# Altium PCB HANCv1.PcbDoc
Units mil, origin at the board's own origin, x right, y up, seen from the top; angles counter-clockwise.
Board outline 6000 x 4000 mil, 2 copper layers (Top Layer, Bottom Layer); 214 components, 228 nets, 817 pads, 36 vias.
Unrouted connection lines stored in the file: 457.
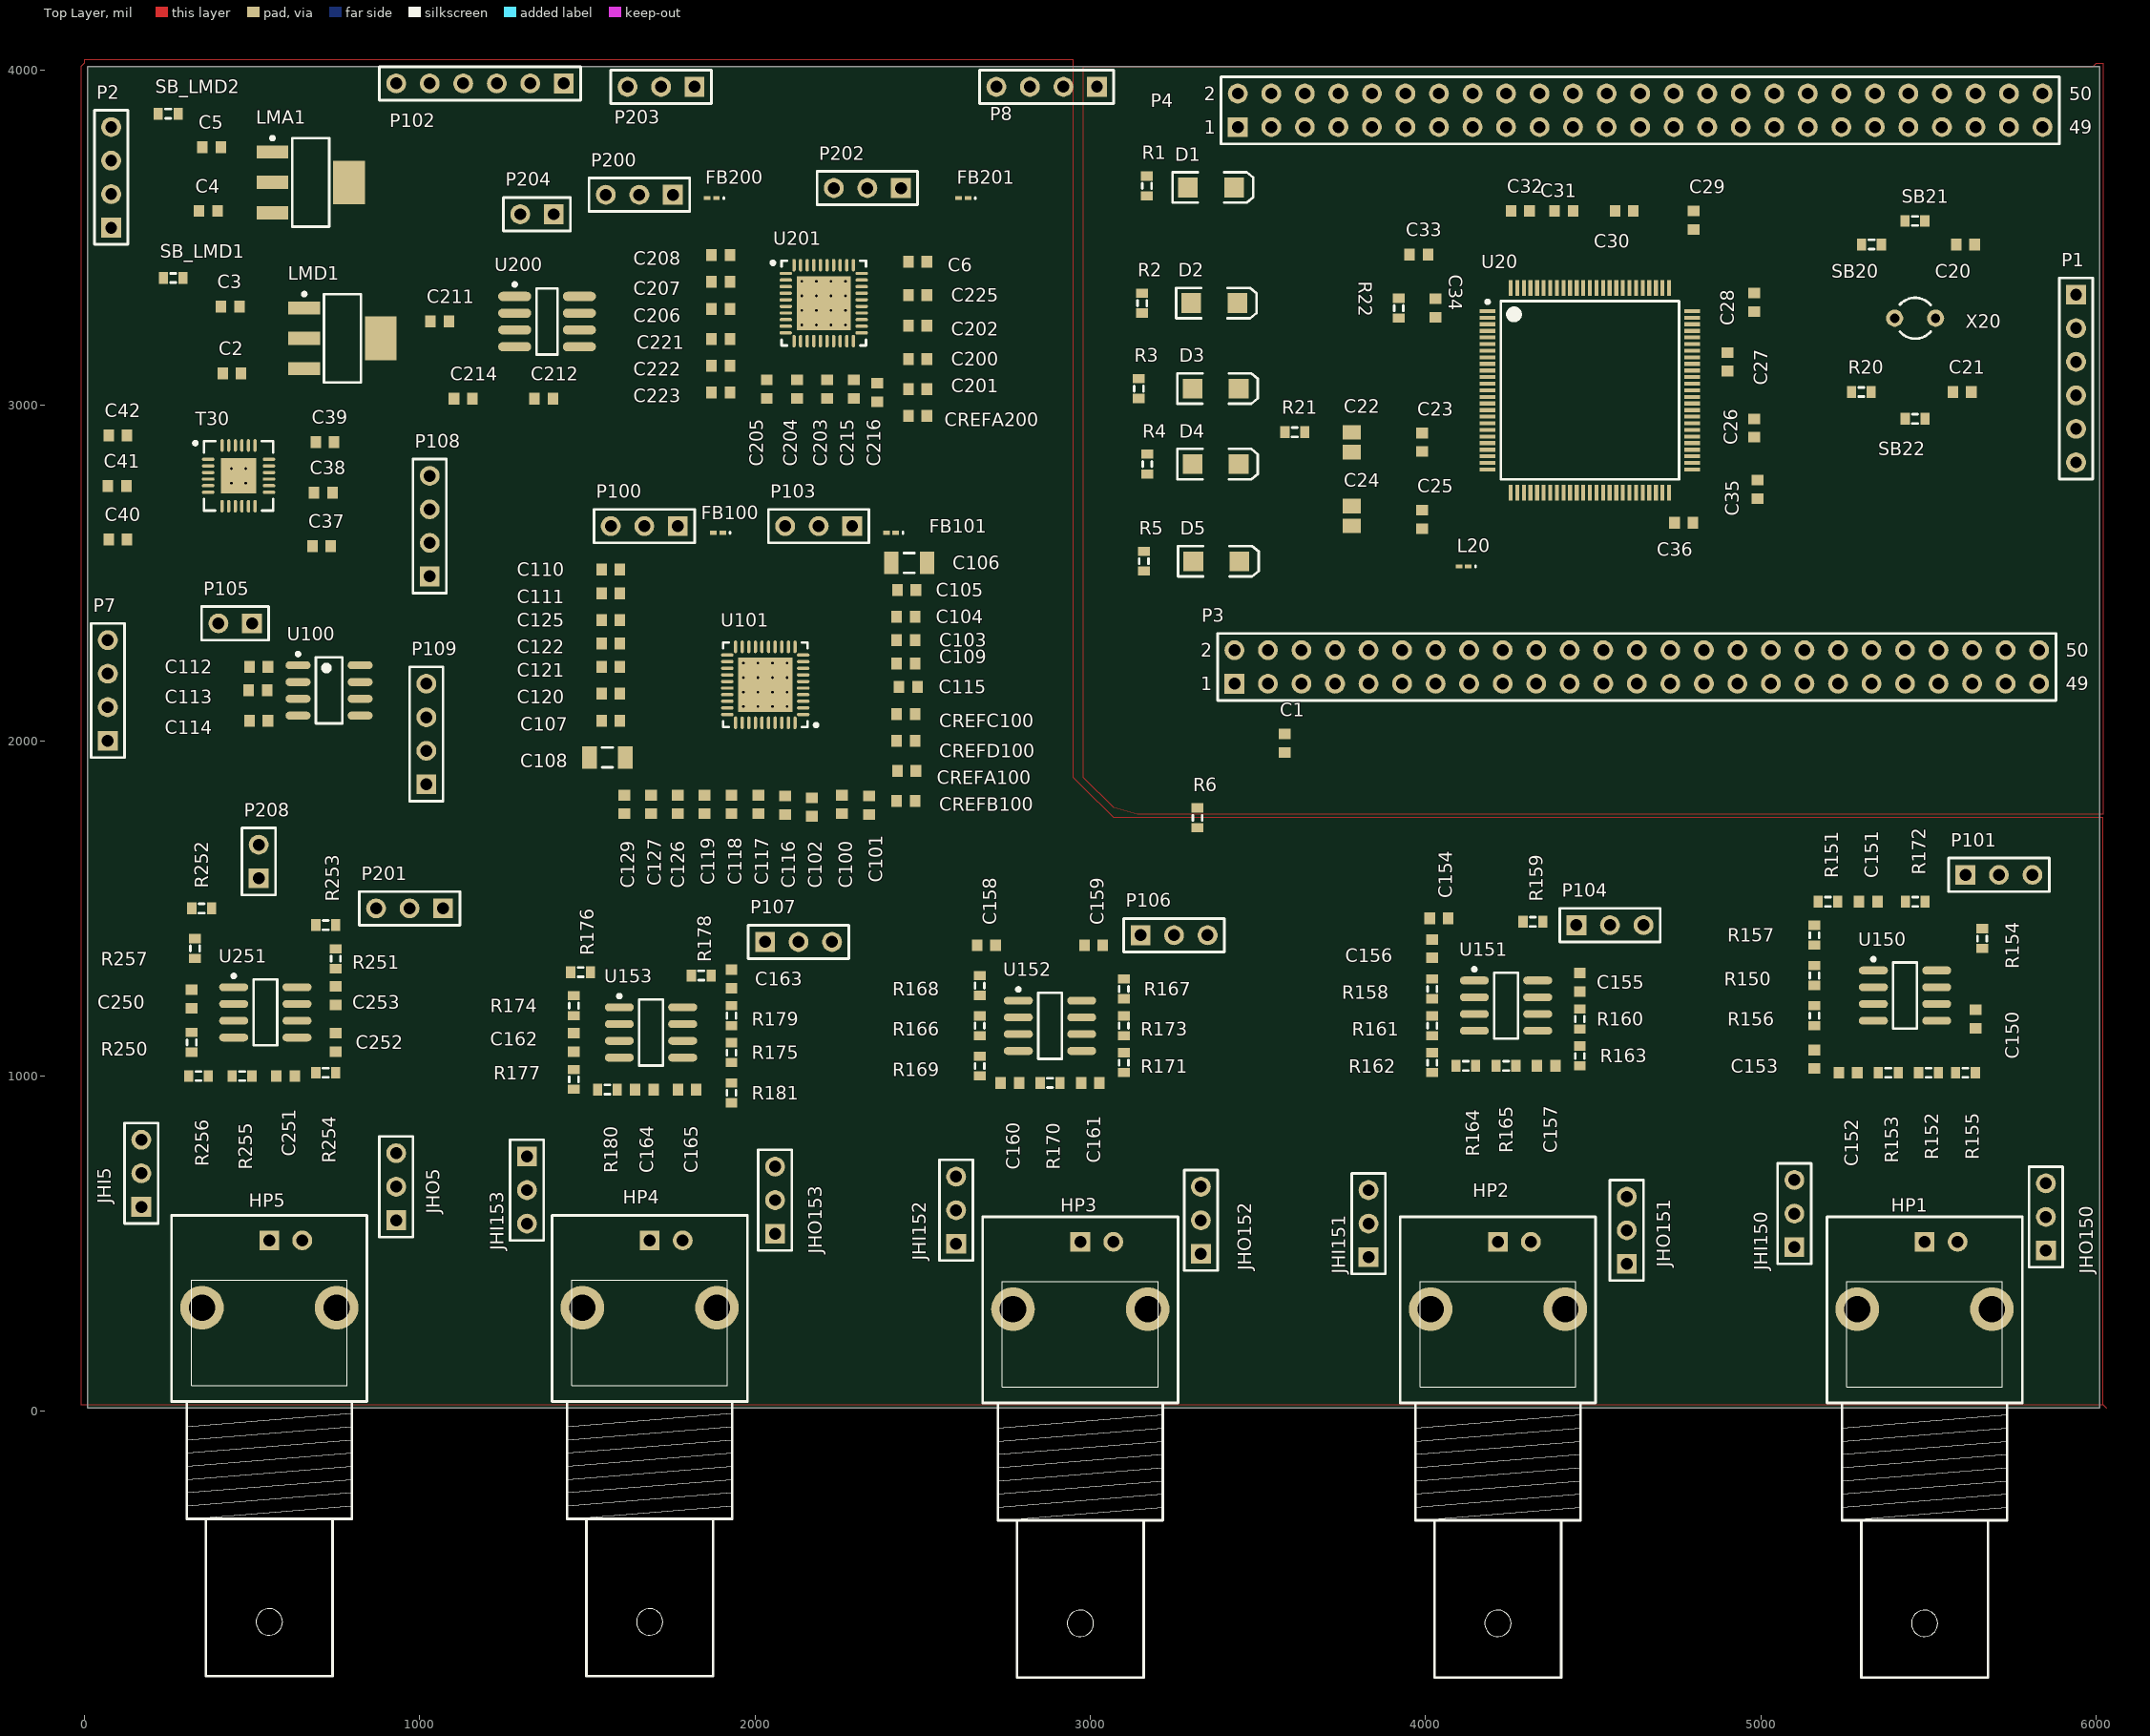
[diagram p0: Top Layer view]
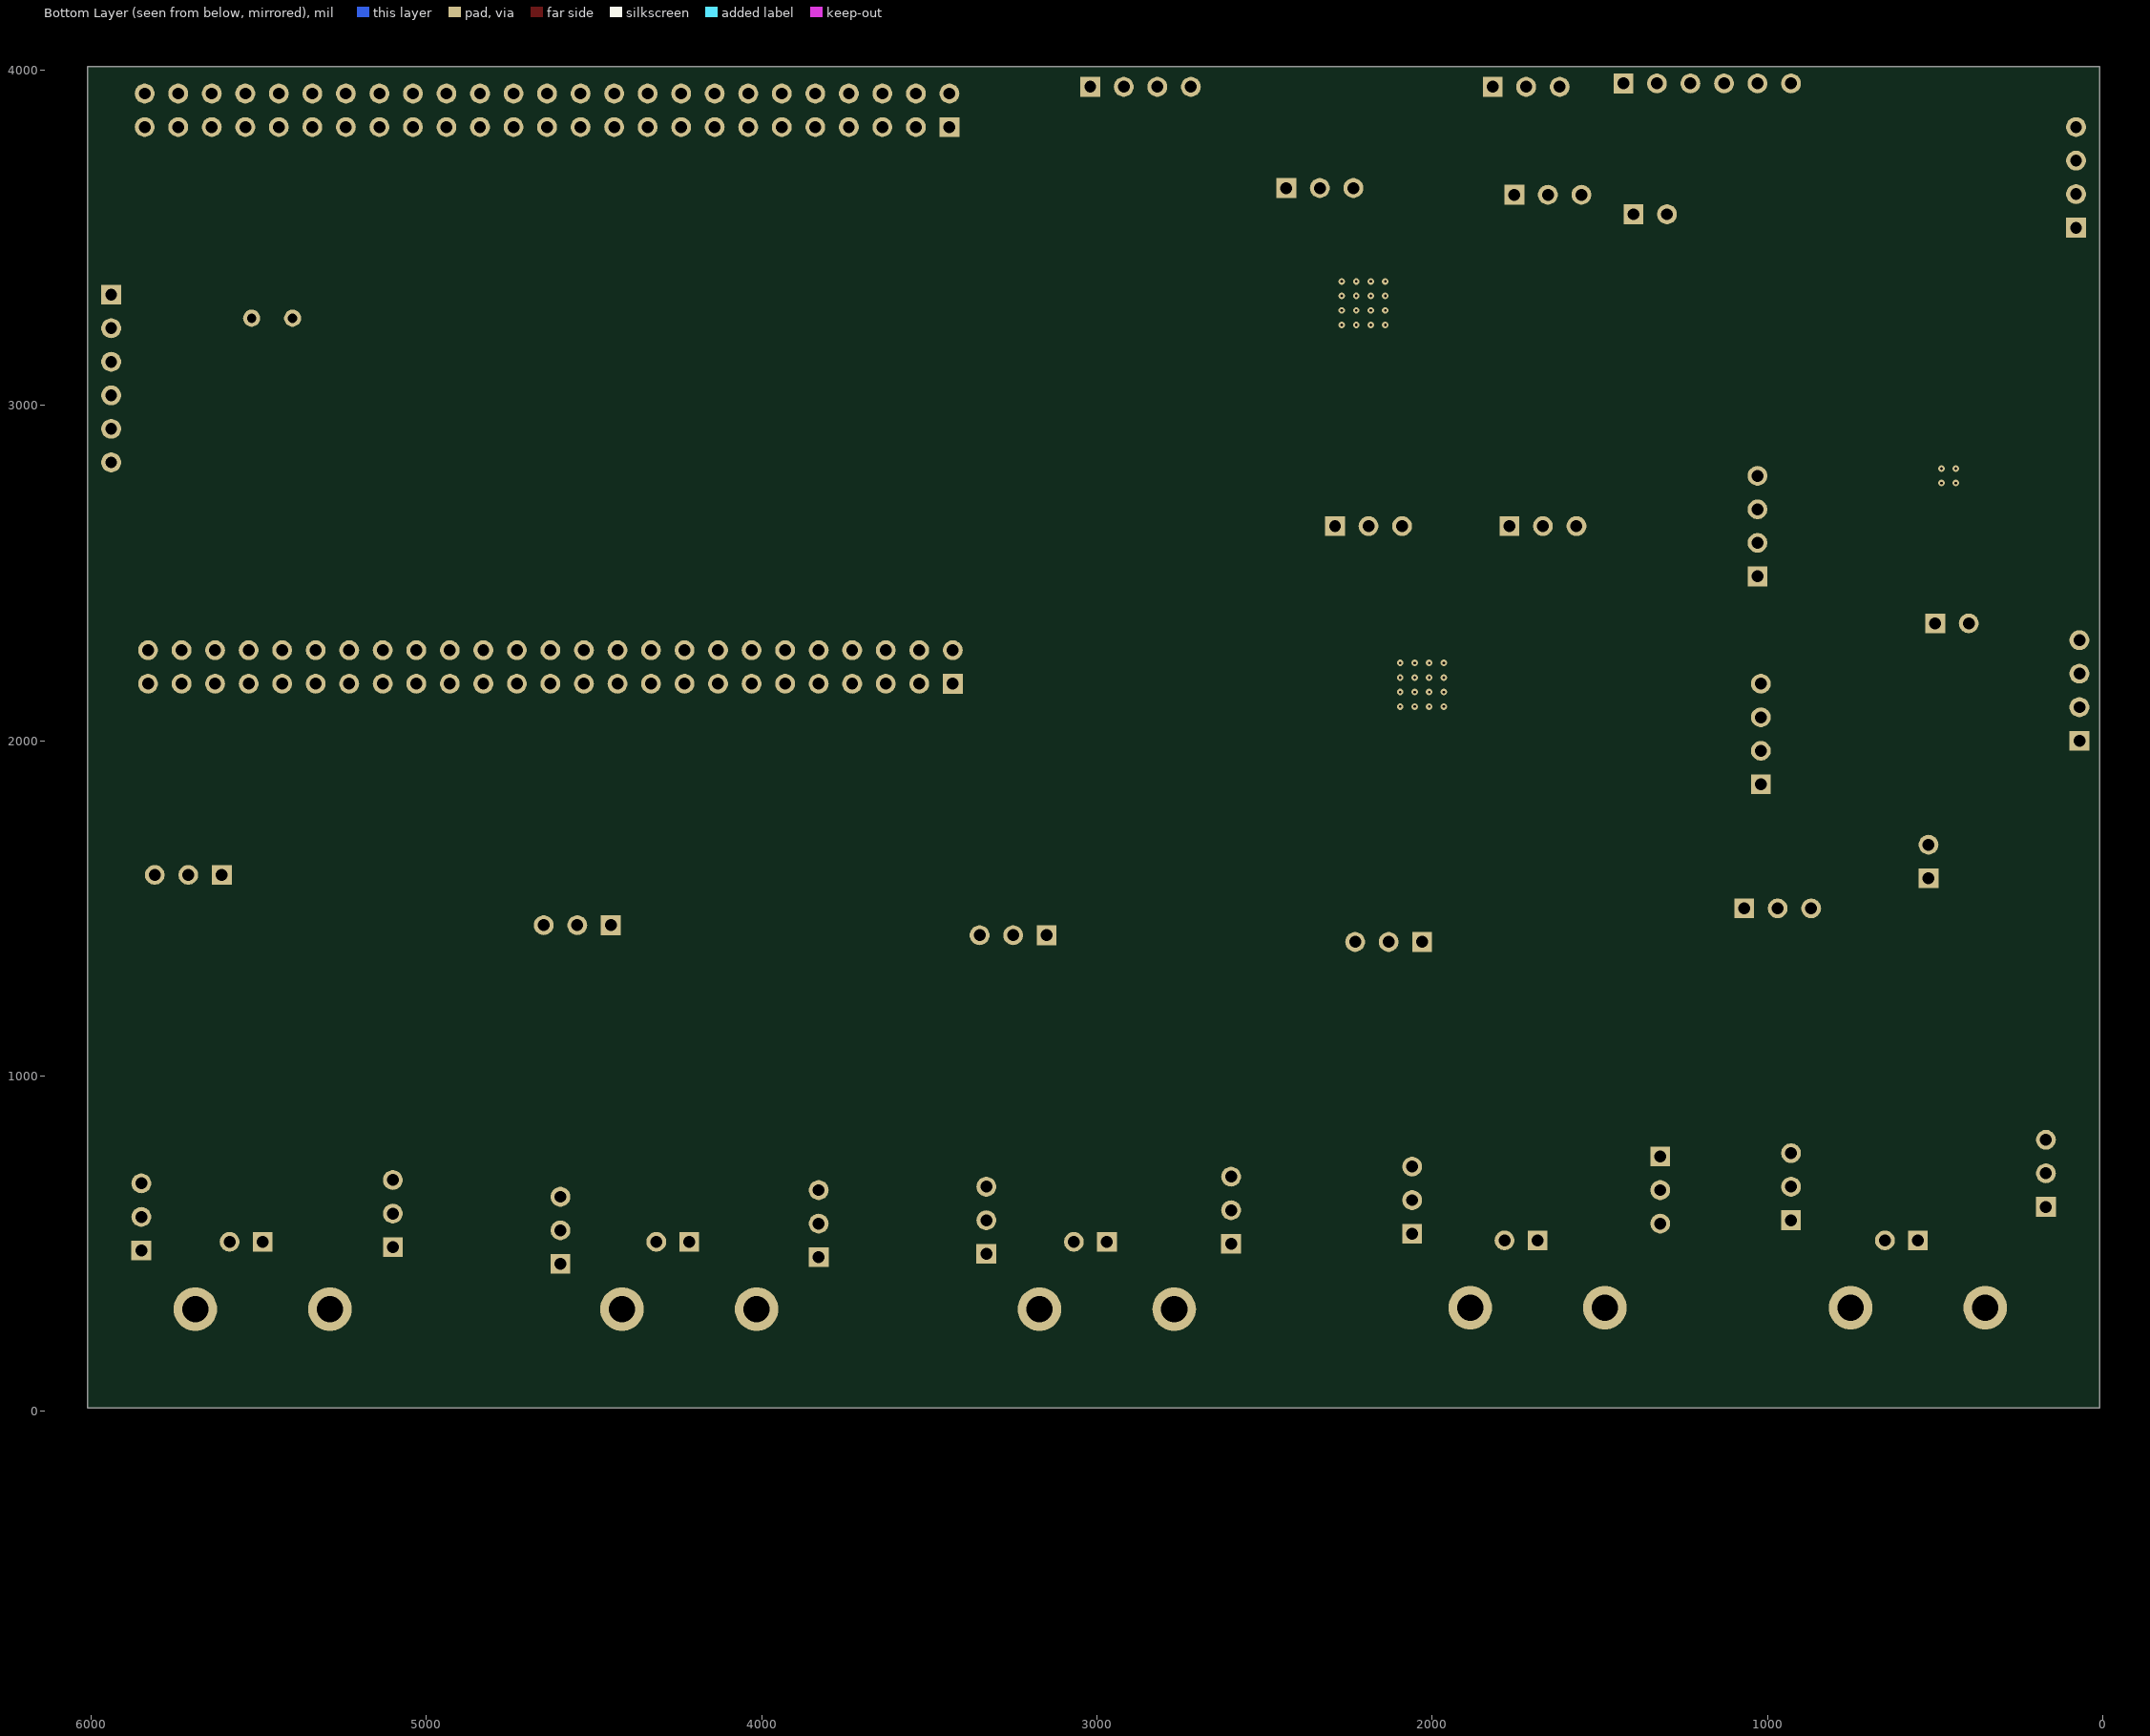
[diagram p1: Bottom Layer view, seen from below]

## Layer stack, top to bottom
Top Solder: solder mask 0.4, Solder Resist, Dk 3.5
Top Layer: signal copper 1.4
Dielectric 1: dielectric 12.6, FR-4, Dk 4.8
Bottom Layer: signal copper 1.4
Bottom Solder: solder mask 0.4, Solder Resist, Dk 3.5

## Board outline
10,10 6010,10 6010,4010 10,4010

## Design rules (kind name [scope] priority, off if disabled: settings)
Clearance [All] p1: gap=10
PolygonConnect [All] p1: connectstyle=Relief reliefconductorwidth=10 reliefentries=4 polygonreliefangle="90 Angle" airgapwidth=10
RoutingVias [All] p1: holewidth=28 width=50 viastyle="Through Hole" minholewidth=28 minwidth=50 maxholewidth=28 maxwidth=50
SolderMaskExpansion [All] p1: expansion=4
Width [All] p1: maxlimit=10 minlimit=10 preferedwidth=10
30 further rules are at their usual default settings.

## Classes and differential pairs
component class U_RS-232: C37 C38 C39 C40 C41 C42 T30
component class U_MAXIM-ADC2: C200 C201 C202 C203 C204 C205 C206 C207 C208 C211 C212 C214 C215 C216 C221 C222 C223 C225 CREFA200 FB200 FB201 P200 P201 P202 P203 P204 P208 U200 U201
component class U_MAXIM-ADC1: C100 C101 C102 C103 C104 C105 C106 C107 C108 C109 C110 C111 C112 C113 C114 C115 C116 C117 C118 C119 C120 C121 C122 C125 C126 C127 C129 CREFA100 CREFB100 CREFC100 CREFD100 FB100 FB101 P100 P101 P102 P103 P104 P105 P106 P107 P108 P109 U100 U101
component class U1: C20 C21 C22 C23 C24 C25 C26 C27 C28 C29 C30 C31 C32 C33 C34 C35 C36 L20 R20 R21 R22 SB20 SB21 SB22 U20 X20
component class HANC1.0_SCH: C1 C2 C3 C4 C5 C6 D1 D2 D3 D4 D5 LMA1 LMD1 P1 P2 P3 P4 P7 P8 R1 R2 R3 R4 R5 R6 SB_LMD1 SB_LMD2
component class HAMP2: C250 C251 C252 C253 HP5 JHI5 JHO5 R250 R251 R252 R253 R254 R255 R256 R257 U251
component class HAMP1: C150 C151 C152 C153 C154 C155 C156 C157 C158 C159 C160 C161 C162 C163 C164 C165 HP1 HP2 HP3 HP4 JHI150 JHI151 JHI152 JHI153 JHO150 JHO151 JHO152 JHO153 R150 R151 R152 R153 R154 R155 R156 R157 R158 R159 R160 R161 R162 R163 R164 R165 R166 R167 R168 R169 R170 R171 R172 R173 R174 R175 R176 R177 R178 R179 R180 R181 U150 U151 U152 U153

## Components (designator, comment, footprint, x,y, rotation, side; value= is the part's Value field where it differs from the comment)
C1 "Cap Semi" 1608[0603] 3580,1992.44 r90 top
C2 "Cap" 1608[0603] 440,3095 r0 top
C3 "Cap Semi" 1608[0603] 435,3295 r0 top
C4 "Cap Semi" 1608[0603] 370,3580 r180 top
C5 "Cap Semi" 1608[0603] 380,3770 r180 top
C6 "Cap Semi" 1608[0603] 2485.2,3428.15 r0 top
C20 "Cap Semi" 1608[0603] 5610,3480 r180 top
C21 "Cap Semi" 1608[0603] 5600,3040 r180 top
C22 "Cap Pol3" C0805 3780,2890 r90 top
C23 "Cap Semi" 1608[0603] 3990,2890 r90 top
C24 "Cap Pol3" C0805 3780,2670 r90 top
C25 "Cap Semi" 1608[0603] 3990,2660 r90 top
C26 "Cap Semi" 1608[0603] 4980,2932.44 r90 top
C27 "Cap Semi" 1608[0603] 4900,3130 r90 top
C28 "Cap Semi" 1608[0603] 4980,3307.56 r90 top
C29 "Cap Semi" 1608[0603] 4800,3552.44 r270 top
C30 "Cap Semi" 1608[0603] 4592.44,3580 r180 top
C31 "Cap Semi" 1608[0603] 4412.44,3580 r0 top
C32 "Cap Semi" 1608[0603] 4282.44,3580 r0 top
C33 "Cap Semi" 1608[0603] 3980,3450 r0 top
C34 "Cap Semi" 1608[0603] 4030,3290 r270 top
C35 "Cap Semi" 1608[0603] 4990,2750 r90 top
C36 "Cap Semi" 1608[0603] 4770,2650 r180 top
C37 "Cap Semi" 1608[0603] 707.56,2580 r180 top
C38 "Cap Semi" 1608[0603] 712.44,2740 r180 top
C39 "Cap Semi" 1608[0603] 717.56,2890 r180 top
C40 "Cap Semi" 1608[0603] 100,2600 r0 top
C41 "Cap Semi" 1608[0603] 97.56,2760 r180 top
C42 "Cap Semi" 1608[0603] 100,2910 r180 top
C100 "Cap Semi" 1608[0603] 2260,1810 r90 top
C101 "Cap Semi" 1608[0603] 2340,1807.56 r90 top
C102 "Cap" 1608[0603] 2170,1802.44 r90 top
C103 "Cap Semi" 1608[0603] 2450,2300 r180 top
C104 "Cap Semi" 1608[0603] 2450,2370 r180 top
C105 "Cap Semi" 1608[0603] 2452.44,2450 r180 top
C106 "Cap Semi" C1206 2460,2530 r0 top
C107 "Cap Semi" 1608[0603] 1570,2060 r180 top
C108 "Cap Semi" C1206 1560,1950 r180 top
C109 "Cap Semi" 1608[0603] 2450,2230 r0 top
C110 "Cap Semi" 1608[0603] 1570,2510 r0 top
C111 "Cap Semi" 1608[0603] 1570,2440 r180 top
C112 "Cap Semi" 1608[0603] 520,2220 r180 top
C113 "Cap Semi" 1608[0603] 517.56,2150 r180 top
C114 "Cap Semi" 1608[0603] 520,2060 r0 top
C115 "Cap Semi" 1608[0603] 2457.56,2160 r180 top
C116 "Cap Semi" 1608[0603] 2090,1807.56 r270 top
C117 "Cap Semi" 1608[0603] 2010,1810 r270 top
C118 "Cap Semi" 1608[0603] 1930,1810 r270 top
C119 "Cap Semi" 1608[0603] 1850,1810 r270 top
C120 "Cap Semi" 1608[0603] 1570,2140 r0 top
C121 "Cap Semi" 1608[0603] 1570,2220 r0 top
C122 "Cap Semi" 1608[0603] 1570,2290 r0 top
C125 "Cap Semi" 1608[0603] 1570,2360 r0 top
C126 "Cap Semi" 1608[0603] 1770,1810 r270 top
C127 "Cap Semi" 1608[0603] 1690,1810 r270 top
C129 "Cap Semi" 1608[0603] 1610,1810 r270 top
C150 "Cap Semi" 1608[0603] 5640,1170 r90 top
C151 "Cap Semi" 1608[0603] 5320,1520 r180 top
C152 "Cap Semi" 1608[0603] 5260,1010 r180 top
C153 "Cap Semi" 1608[0603] 5160,1050 r90 top
C154 "Cap Semi" 1608[0603] 4040,1470 r180 top
C155 "Cap Semi" 1608[0603] 4460,1280 r90 top
C156 "Cap Semi" 1608[0603] 4020,1380 r90 top
C157 "Cap Semi" 1608[0603] 4360,1030 r180 top
C158 "Cap Semi" 1608[0603] 2690,1390 r180 top
C159 "Cap Semi" 1608[0603] 3010,1390 r180 top
C160 "Cap Semi" 1608[0603] 2760,980 r180 top
C161 "Cap Semi" 1608[0603] 3000,980 r0 top
C162 "Cap Semi" 1608[0603] 1460,1100 r90 top
C163 "Cap Semi" 1608[0603] 1930,1290 r270 top
C164 "Cap Semi" 1608[0603] 1670,960 r180 top
C165 "Cap Semi" 1608[0603] 1797.56,960 r180 top
C200 "Cap Semi" 1608[0603] 2485.2,3138.15 r180 top
C201 "Cap Semi" 1608[0603] 2485.2,3048.15 r180 top
C202 "Cap Semi" 1608[0603] 2485.2,3238.15 r180 top
C203 "Cap Semi" 1608[0603] 2215.2,3048.15 r270 top
C204 "Cap Semi" 1608[0603] 2125.2,3048.15 r90 top
C205 "Cap Semi" 1608[0603] 2035.2,3048.15 r90 top
C206 "Cap Semi" 1608[0603] 1897.64,3288.15 r180 top
C207 "Cap Semi" 1608[0603] 1897.64,3368.15 r180 top
C208 "Cap Semi" 1608[0603] 1897.64,3448.15 r180 top
C211 "Cap Semi" 1608[0603] 1060,3250 r180 top
C212 "Cap Semi" 1608[0603] 1370,3020 r0 top
C214 "Cap Semi" 1608[0603] 1130,3020 r180 top
C215 "Cap Semi" 1608[0603] 2295.2,3048.15 r90 top
C216 "Cap Semi" 1608[0603] 2365.2,3038.15 r90 top
C221 "Cap Semi" 1608[0603] 1897.64,3198.15 r180 top
C222 "Cap Semi" 1608[0603] 1897.64,3118.15 r180 top
C223 "Cap Semi" 1608[0603] 1897.64,3038.15 r180 top
C225 "Cap Semi" 1608[0603] 2485.2,3328.15 r180 top
C250 "Cap Semi" 1608[0603] 320,1230 r270 top
C251 "Cap Semi" 1608[0603] 600.47,1000 r180 top
C252 "Cap Semi" 1608[0603] 750,1100 r90 top
C253 "Cap Semi" 1608[0603] 750,1240 r270 top
CREFA100 "Cap Semi" 1608[0603] 2452.44,1910 r180 top
CREFA200 "Cap Semi" 1608[0603] 2485.2,2968.15 r180 top
CREFB100 "Cap Semi" 1608[0603] 2450,1820 r180 top
CREFC100 "Cap Semi" 1608[0603] 2450,2080 r0 top
CREFD100 "Cap Semi" 1608[0603] 2450,2000 r0 top
D1 "LED2" 3.2X1.6X1.1 3360,3650 r0 top
D2 "LED2" 3.2X1.6X1.1 3370,3305 r0 top
D3 "LED2" 3.2X1.6X1.1 3373.9,3050 r0 top
D4 "LED2" 3.2X1.6X1.1 3373.9,2825 r0 top
D5 "LED2" 3.2X1.6X1.1 3376.1,2535 r0 top
FB100 "FerriteBead" 0603 1890,2620 r180 top
FB101 "FerriteBead" 0603 2406.22,2620 r180 top
FB200 "FerriteBead" 0603 1871.42,3618.15 r180 top
FB201 "FerriteBead" 0603 2621.42,3618.15 r180 top
HP1 "BNC" "BNC_RA CON" 5488.35,505.79 r90 top
HP2 "BNC" "BNC_RA CON" 4215.79,505.79 r90 top
HP3 "BNC" "BNC_RA CON" 2970.47,505.79 r90 top
HP4 "BNC" "BNC_RA CON" 1686.06,510 r90 top
HP5 "BNC" "BNC_RA CON" 551.57,510 r90 top
JHI5 "Header 3" HDR1X3 170,610 r90 top
JHI150 "Header 3" HDR1X3 5100,490 r90 top
JHI151 "Header 3" HDR1X3 3830,460 r90 top
JHI152 "Header 3" HDR1X3 2600,500 r90 top
JHI153 "Header 3" HDR1X3 1320,760 r270 top
JHO5 "Header 3" HDR1X3 930,570 r90 top
JHO150 "Header 3" HDR1X3 5850,480 r90 top
JHO151 "Header 3" HDR1X3 4600,440 r90 top
JHO152 "Header 3" HDR1X3 3330,470 r90 top
JHO153 "Header 3" HDR1X3 2060,530 r90 top
L20 "Inductor" 0603 4113.78,2520 r180 top
LMA1 "LM3940" SOT223_N 675,3665 r0 top
LMD1 "LM3940" SOT223_N 770,3200 r0 top
P1 "SWD" HDR1X6 5940,3330 r270 top
P2 "4AUX" HDR1X4 80,3530 r90 top
P3 "Header 25X2" HDR2X25 3430,2170 r0 top
P4 "Header 25X2" HDR2X25 3440,3830 r0 top
P7 "Header 4" HDR1X4 70,2000 r90 top
P8 "Header 4" HDR1X4 3020,3950 r180 top
P100 "Header 3" HDR1X3 1770,2640 r180 top
P101 "Header 3" HDR1X3 5610,1600 r0 top
P102 "Header 6" HDR1X6 1430,3960 r180 top
P103 "Header 3" HDR1X3 2290,2640 r180 top
P104 "Header 3" HDR1X3 4450,1450 r0 top
P105 "Header 2" HDR1X2 500,2350 r180 top
P106 "Header 3" HDR1X3 3150,1420 r0 top
P107 "Header 3" HDR1X3 2030,1400 r0 top
P108 "Header 4" HDR1X4 1030,2490 r90 top
P109 "Header 4" HDR1X4 1020,1870 r90 top
P200 "Header 3" HDR1X3 1755.2,3628.15 r180 top
P201 "Header 3" HDR1X3 1070,1500 r180 top
P202 "Header 3" HDR1X3 2435.2,3648.15 r180 top
P203 "Header 3" HDR1X3 1820,3950 r180 top
P204 "Header 2" HDR1X2 1400,3570 r180 top
P208 "Header 2" HDR1X2 520,1590 r90 top
R1 "Res3" J1-0603 3168.9,3654.53 r90 top
R2 "Res3" J1-0603 3155,3305 r90 top
R3 "Res3" J1-0603 3145,3050 r90 top
R4 "Res3" J1-0603 3170,2825 r90 top
R5 "Res3" J1-0603 3160,2535.47 r90 top
R6 "Res3" J1-0603 3320,1770 r270 top
R20 "Res3" J1-0603 5299.53,3040 r180 top
R21 "Res3" J1-0603 3610,2920 r180 top
R22 "Res3" J1-0603 3920,3290 r90 top
R150 "Res3" J1-0603 5160,1300 r90 top
R151 "Res3" J1-0603 5200,1520 r180 top
R152 "Res3" J1-0603 5500,1010 r180 top
R153 "Res3" J1-0603 5380,1010 r180 top
R154 "Res3" J1-0603 5660,1410 r90 top
R155 "Res3" J1-0603 5610,1010 r180 top
R156 "Res3" J1-0603 5160,1180 r90 top
R157 "Res3" J1-0603 5160,1420 r270 top
R158 "Res3" J1-0603 4020,1260 r90 top
R159 "Res3" J1-0603 4320,1460 r180 top
R160 "Res3" J1-0603 4460,1170 r270 top
R161 "Res3" J1-0603 4020,1150 r90 top
R162 "Res3" J1-0603 4020,1040 r90 top
R163 "Res3" J1-0603 4460,1060 r270 top
R164 "Res3" J1-0603 4120,1030 r180 top
R165 "Res3" J1-0603 4240,1030 r0 top
R166 "Res3" J1-0603 2670,1150 r90 top
R167 "Res3" J1-0603 3100,1260 r90 top
R168 "Res3" J1-0603 2670,1270 r270 top
R169 "Res3" J1-0603 2670,1030 r90 top
R170 "Res3" J1-0603 2880,980 r0 top
R171 "Res3" J1-0603 3100,1040 r270 top
R172 "Res3" J1-0603 5460.47,1520 r180 top
R173 "Res3" J1-0603 3100,1150 r90 top
R174 "Res3" J1-0603 1460,1210 r90 top
R175 "Res3" J1-0603 1930,1070 r90 top
R176 "Res3" J1-0603 1480,1310 r180 top
R177 "Res3" J1-0603 1460,990 r270 top
R178 "Res3" J1-0603 1840,1300 r0 top
R179 "Res3" J1-0603 1930,1180 r90 top
R180 "Res3" J1-0603 1560,960 r180 top
R181 "Res3" J1-0603 1930,950 r90 top
R250 "Res3" J1-0603 320,1100.47 r90 top
R251 "Res3" J1-0603 750,1350 r270 top
R252 "Res3" J1-0603 350,1500 r0 top
R253 "Res3" J1-0603 720,1450 r0 top
R254 "Res3" J1-0603 720,1010 r0 top
R255 "Res3" J1-0603 470.47,1000 r180 top
R256 "Res3" J1-0603 340.47,1000 r180 top
R257 "Res3" J1-0603 330,1380.47 r90 top
SB20 "Res3" J1-0603 5330,3480 r180 top
SB21 "Res3" J1-0603 5459.53,3550 r180 top
SB22 "Res3" J1-0603 5460,2960 r180 top
SB_LMD1 "Res3" J1-0603 265,3380 r180 top
SB_LMD2 "Res3" J1-0603 250,3870 r180 top
T30 "TRS3122" QFN50P485X485X100_HS-25N 460,2790 r0 top
U20 "STM32F413VGT6" STM-LQFP100_V 4490,3045 r0 top
U100 "MAX6126AASA41+" MAXM-S8+4_L 730,2150 r0 top
U101 "MAX11043" QFN50P600X600X80_HS-41N 2030.79,2166.81 r180 top
U150 "OP262TRZ-EP" ADI-R-8_N 5430,1240 r0 top
U151 "OP262TRZ-EP" ADI-R-8_N 4240,1210 r0 top
U152 "OP262TRZ-EP" ADI-R-8_N 2880,1150 r0 top
U153 "OP262TRZ-EP" ADI-R-8_N 1690,1130 r0 top
U200 "MAX6126AASA41+" MAXM-S8+4_M 1380,3250 r0 top
U201 "MAX11043" QFN50P600X600X80_HS-41N 2205.04,3304.96 r0 top
U251 "OP262TRZ-EP" ADI-R-8_N 540,1190 r0 top
X20 "16MHz" R38 5460,3260 r90 top

## Footprints (in the part's own frame and the unit in brackets; to place one, negate y for a bottom-side part, rotate by r counter-clockwise, add the part's x,y. Pads: shape width x height; smd on the part's side, far side on the other; paste and mask are expansions set on the pad)
3.2X1.6X1.1 [mm] "SMT LED; 2 Flat Leads"
  rect 1.5x1.5 smd: 1(-1.75,0) 2(1.75,0)
  silkscreen extent -2.9,-1.15 3.2,1.15
0603 [mm] "Chip Inductor, Body 0.6x0.3mm, IPC High Density"
  rect 0.5x0.3 smd: 1(-0.35,0) 2(0.35,0)
  silkscreen extent -0.9,-0.05 -0.9,0.05, body extent -0.33,-0.18 0.33,0.18, height 0.55
1608[0603] [mm] "Chip Capacitor, Body 1.6x0.8mm, IPC High Density"
  rect 0.8x0.9 smd: 1(-0.7,0) 2(0.7,0)
  body extent -0.87,-0.48 0.87,0.48, height 1.3
ADI-R-8_N [mm] "SOIC, 8-Leads, Body 4.9x3.9mm, Pitch 1.27mm, IPC Medium Density"
  oval 2.2x0.6 smd: 1(-2.4,1.905) 2(-2.4,0.635) 3(-2.4,-0.635) 4(-2.4,-1.905) 5(2.4,-1.905) 6(2.4,-0.635) 7(2.4,0.635) 8(2.4,1.905)
  silkscreen extent -2.52,-2.5 0.9,2.88, body extent -2,-2.5 2,2.5, height 1.75
"BNC_RA CON" [mm] "Connector; BNC Elbow"
  rect 1.5x1.5 hole 0.9: 1(0,0)
  round 3.3 hole 2: 2(-5.1,-5.1) 2(-5.1,5.1)
  round 1.5 hole 0.9: 2(0,-2.5)
  silkscreen extent -33,-7.4 1.9,7.4
C0805 [mm] "Chip Capacitor, Body 2.0x1.3mm, IPC High Density"
  rect 1.1x1.4 smd: 1(-0.75,0) 2(0.75,0)
  body extent -1.1,-0.72 1.1,0.72, height 1.4
C1206 [mm] "Chip Capacitor, Body 3.2x1.6mm, IPC High Density"
  rect 1.1x1.7 smd: 1(-1.35,0) 2(1.35,0)
  silkscreen extent -0.4,-0.75 0.4,0.75, body extent -1.7,-0.9 1.7,0.9, height 1.3
HDR1X2 [mm] "Connector; Header; 2 Position"
  rect 1.5x1.5 hole 0.9: 1(0,0)
  round 1.5 hole 0.9: 2(2.54,0)
  silkscreen extent -1.27,-1.27 3.81,1.27
HDR1X3 [mm] "Connector; Header; 3 Position"
  rect 1.5x1.5 hole 0.9: 1(0,0)
  round 1.5 hole 0.9: 2(2.54,0) 3(5.08,0)
  silkscreen extent -1.27,-1.27 6.35,1.27
HDR1X4 [mm] "Connector; Header; 4 Position"
  rect 1.5x1.5 hole 0.9: 1(0,0)
  round 1.5 hole 0.9: 2(2.54,0) 3(5.08,0) 4(7.62,0)
  silkscreen extent -1.27,-1.27 8.89,1.27
HDR1X6 [mm] "Connector; Header; 6 Position"
  rect 1.5x1.5 hole 0.9: 1(0,0)
  round 1.5 hole 0.9: 2(2.54,0) 3(5.08,0) 4(7.62,0) 5(10.16,0) 6(12.7,0)
  silkscreen extent -1.27,-1.27 13.97,1.27
HDR2X25 [mm] "Connector; Header; 25x2 Position"
  rect 1.5x1.5 hole 0.9: 1(0,0)
  round 1.5 hole 0.9: 2(0,2.54) 3(2.54,0) 4(2.54,2.54) 5(5.08,0) 6(5.08,2.54) 7(7.62,0) 8(7.62,2.54) 9(10.16,0) 10(10.16,2.54) 11(12.7,0) 12(12.7,2.54) 13(15.24,0) 14(15.24,2.54) 15(17.78,0) 16(17.78,2.54) 17(20.32,0) 18(20.32,2.54) 19(22.86,0) 20(22.86,2.54) 21(25.4,0) 22(25.4,2.54) 23(27.94,0) 24(27.94,2.54) 25(30.48,0) 26(30.48,2.54) 27(33.02,0) 28(33.02,2.54) 29(35.56,0) 30(35.56,2.54) 31(38.1,0) 32(38.1,2.54) 33(40.64,0) 34(40.64,2.54) 35(43.18,0) 36(43.18,2.54) 37(45.72,0) 38(45.72,2.54) 39(48.26,0) 40(48.26,2.54) 41(50.8,0) 42(50.8,2.54) 43(53.34,0) 44(53.34,2.54) 45(55.88,0) 46(55.88,2.54) 47(58.42,0) 48(58.42,2.54) 49(60.96,0) 50(60.96,2.54)
  silkscreen extent -1.27,-1.27 62.23,3.81
J1-0603 [mm] "Chip Resistor, Body 1.6x0.8mm, IPC High Density"
  rect 0.7x0.9 smd: 1(-0.75,0) 2(0.75,0)
  silkscreen extent -0.2,-0.35 0.2,0.35, body extent -0.85,-0.48 0.85,0.48, height 0.9
MAXM-S8+4_L [mm] "SOIC, 8-Leads, Body 4.9x3.9mm, Pitch 1.27mm, IPC High Density"
  oval 1.9x0.6 smd: 1(-2.35,1.905) 2(-2.35,0.635) 3(-2.35,-0.635) 4(-2.35,-1.905) 5(2.35,-1.905) 6(2.35,-0.635) 7(2.35,0.635) 8(2.35,1.905)
  silkscreen extent -2.47,-2.5 1,2.88, body extent -2,-2.5 2,2.5, height 1.75
MAXM-S8+4_M [mm] "SOIC, 8-Leads, Body 4.9x3.9mm, Pitch 1.27mm, IPC Low Density"
  oval 2.5x0.7 smd: 1(-2.45,1.905) 2(-2.45,0.635) 3(-2.45,-0.635) 4(-2.45,-1.905) 5(2.45,-1.905) 6(2.45,-0.635) 7(2.45,0.635) 8(2.45,1.905)
  silkscreen extent -2.57,-2.5 0.8,2.93, body extent -2,-2.5 2,2.5, height 1.75
QFN50P485X485X100_HS-25N [mm] "QFN, 24-Leads, Body 4.85x4.85mm, Pitch 0.50mm, Thermal Pad 2.70x2.70mm, IPC Medium Density"
  oval 0.95x0.25 smd: 1(-2.3,1.25) 2(-2.3,0.75) 3(-2.3,0.25) 4(-2.3,-0.25) 5(-2.3,-0.75) 6(-2.3,-1.25) 13(2.3,-1.25) 14(2.3,-0.75) 15(2.3,-0.25) 16(2.3,0.25) 17(2.3,0.75) 18(2.3,1.25)
  oval 0.25x0.95 smd: 7(-1.25,-2.3) 8(-0.75,-2.3) 9(-0.25,-2.3) 10(0.25,-2.3) 11(0.75,-2.3) 12(1.25,-2.3) 19(1.25,2.3) 20(0.75,2.3) 21(0.25,2.3) 22(-0.25,2.3) 23(-0.75,2.3) 24(-1.25,2.3)
  rect 2.7x2.7 smd: 25(0,0)
  silkscreen extent -3.4,-2.62 2.62,2.63, body extent -2.48,-2.47 2.47,2.48, height 1
QFN50P600X600X80_HS-41N [mm] "QFN, 40-Leads, Body 6.00x6.00mm, Pitch 0.50mm, Thermal Pad 4.10x4.10mm, IPC Medium Density"
  oval 0.95x0.25 smd: 1(-2.875,2.25) 2(-2.875,1.75) 3(-2.875,1.25) 4(-2.875,0.75) 5(-2.875,0.25) 6(-2.875,-0.25) 7(-2.875,-0.75) 8(-2.875,-1.25) 9(-2.875,-1.75) 10(-2.875,-2.25) 21(2.875,-2.25) 22(2.875,-1.75) 23(2.875,-1.25) 24(2.875,-0.75) 25(2.875,-0.25) 26(2.875,0.25) 27(2.875,0.75) 28(2.875,1.25) 29(2.875,1.75) 30(2.875,2.25)
  oval 0.25x0.95 smd: 11(-2.25,-2.875) 12(-1.75,-2.875) 13(-1.25,-2.875) 14(-0.75,-2.875) 15(-0.25,-2.875) 16(0.25,-2.875) 17(0.75,-2.875) 18(1.25,-2.875) 19(1.75,-2.875) 20(2.25,-2.875) 31(2.25,2.875) 32(1.75,2.875) 33(1.25,2.875) 34(0.75,2.875) 35(0.25,2.875) 36(-0.25,2.875) 37(-0.75,2.875) 38(-1.25,2.875) 39(-1.75,2.875) 40(-2.25,2.875)
  rect 4.1x4.1 smd: 41(0,0)
  silkscreen extent -3.98,-3.2 3.2,3.2, body extent -3.05,-3.05 3.05,3.05, height 0.8
R38 [mm] "Crystal, Thru-Hole; 2 Leads; Body 3.1 x 8.2 mm (Dia.xH)"
  round 1.3 hole 0.7: 1(0,1.55) 2(0,-1.55)
  silkscreen extent -1.55,-1.19 1.55,1.17
SOT223_N [mm] "SOT223, 4-Leads, Body 6.5x3.5mm, Pitch 2.3mm, Lead Span 7mm, IPC Medium Density"
  rect 2.4x1 smd: 1(-2.9,2.3) 2(-2.9,0) 3(-2.9,-2.3)
  rect 2.4x3.3 smd: 4(2.9,0)
  silkscreen extent -3.02,-3.35 1.4,3.47, body extent -1.85,-3.35 1.85,3.35, height 1.7
STM-LQFP100_V [mm] "Thin QFP, 100-Leads, Body 14x14mm, Pitch 0.5mm, ST Recommended"
  rect 1.2x0.3 smd: 1(-7.75,6) 2(-7.75,5.5) 3(-7.75,5) 4(-7.75,4.5) 5(-7.75,4) 6(-7.75,3.5) 7(-7.75,3) 8(-7.75,2.5) 9(-7.75,2) 10(-7.75,1.5) 11(-7.75,1) 12(-7.75,0.5) 13(-7.75,0) 14(-7.75,-0.5) 15(-7.75,-1) 16(-7.75,-1.5) 17(-7.75,-2) 18(-7.75,-2.5) 19(-7.75,-3) 20(-7.75,-3.5) 21(-7.75,-4) 22(-7.75,-4.5) 23(-7.75,-5) 24(-7.75,-5.5) 25(-7.75,-6) 51(7.75,-6) 52(7.75,-5.5) 53(7.75,-5) 54(7.75,-4.5) 55(7.75,-4) 56(7.75,-3.5) 57(7.75,-3) 58(7.75,-2.5) 59(7.75,-2) 60(7.75,-1.5) 61(7.75,-1) 62(7.75,-0.5) 63(7.75,0) 64(7.75,0.5) 65(7.75,1) 66(7.75,1.5) 67(7.75,2) 68(7.75,2.5) 69(7.75,3) 70(7.75,3.5) 71(7.75,4) 72(7.75,4.5) 73(7.75,5) 74(7.75,5.5) 75(7.75,6)
  rect 0.3x1.2 smd: 26(-6,-7.75) 27(-5.5,-7.75) 28(-5,-7.75) 29(-4.5,-7.75) 30(-4,-7.75) 31(-3.5,-7.75) 32(-3,-7.75) 33(-2.5,-7.75) 34(-2,-7.75) 35(-1.5,-7.75) 36(-1,-7.75) 37(-0.5,-7.75) 38(0,-7.75) 39(0.5,-7.75) 40(1,-7.75) 41(1.5,-7.75) 42(2,-7.75) 43(2.5,-7.75) 44(3,-7.75) 45(3.5,-7.75) 46(4,-7.75) 47(4.5,-7.75) 48(5,-7.75) 49(5.5,-7.75) 50(6,-7.75) 76(6,7.75) 77(5.5,7.75) 78(5,7.75) 79(4.5,7.75) 80(4,7.75) 81(3.5,7.75) 82(3,7.75) 83(2.5,7.75) 84(2,7.75) 85(1.5,7.75) 86(1,7.75) 87(0.5,7.75) 88(0,7.75) 89(-0.5,7.75) 90(-1,7.75) 91(-1.5,7.75) 92(-2,7.75) 93(-2.5,7.75) 94(-3,7.75) 95(-3.5,7.75) 96(-4,7.75) 97(-4.5,7.75) 98(-5,7.75) 99(-5.5,7.75) 100(-6,7.75)
  silkscreen extent -7.87,-6.75 6.75,6.82, body extent -8,-8 8,8, height 1.6

## Part data
C1 C3 C4 C5 C6 C20 C21 C23 C25 C26 C27 C28 C29 C30 C31 C32 C33 C34 C35 C36 C37 C38 C39 C40 C41 C42 C100 C101 C103 C104 C105 C106 C107 C108 C109 C110 C111 C112 C113 C114 C115 C116 C117 C118 C119 C120 C121 C122 C125 C126 C127 C129 C150 C151 C152 C153 C154 C155 C156 C157 C158 C159 C160 C161 C162 C163 C164 C165 C200 C201 C202 C203 C204 C205 C206 C207 C208 C211 C212 C214 C215 C216 C221 C222 C223 C225 C250 C251 C252 C253 CREFA100 CREFA200 CREFB100 CREFC100 CREFD100: "Capacitor (Semiconductor SIM Model)"
C2 C102: library part "Cap Semi", "Capacitor (Semiconductor SIM Model)"
C22 C24: "Polarized Capacitor (Surface Mount)"
D1 D2 D3 D4 D5: "Typical RED, GREEN, YELLOW, AMBER GaAs LED"
FB100 FB101 FB200 FB201: library part Inductor, "Inductor"
HP1 HP2 HP3 HP4 HP5: "BNC Elbow Connector"
JHI5 JHI150 JHI151 JHI152 JHI153 JHO5 JHO150 JHO151 JHO152 JHO153 P100 P101 P103 P104 P106 P107 P200 P201 P202 P203: "Header, 3-Pin"
LMA1 LMD1 T30: library part Component_1
P1: library part "Header 6", "Header, 6-Pin"
P2: library part "Header 4", "Header, 4-Pin"
P3 P4: "Header, 25-Pin, Dual row"
P7 P8 P108 P109: "Header, 4-Pin"
P102: "Header, 6-Pin"
P105 P204 P208: "Header, 2-Pin"
R1 R2 R3 R4 R5 R6 R20 R21 R22 R150 R151 R152 R153 R154 R155 R156 R157 R158 R159 R160 R161 R162 R163 R164 R165 R166 R167 R168 R169 R170 R171 R172 R173 R174 R175 R176 R177 R178 R179 R180 R181 R250 R251 R252 R253 R254 R255 R256 R257 SB21 SB_LMD1 SB_LMD2: "Resistor"
SB20: "SB PH0"
SB22: "SB_PH1"
U20: library part CMP-1771-00004-1, "ARM Cortex-M4 32-Bit DSP+FPU, 1024 KB Flash, 82 I/Os, 100-Pin LQFP, -40 to 85 degC, Tray"
U100 U200: library part CMP-0977-00016-1, "Ultra-High-Precision, Ultra-Low-Noise, Series Voltage Reference, 4.096 V, -40 to 125 degC, 8-Pin SOIC (S8+4), RoHS, Tube"
U150 U151 U152 U153 U251: "Double Channel Wide Bandwidth Operational Amplifier, 15 MHz BW, 13 V/us SR, Military, 8-pin SOIC (R-8), Tube"
X20: library part XTAL, "Crystal Oscillator"

## Via types
v1: diameter 19.68, hole 7.87, Top Layer to Bottom Layer, 36 vias

## Nets (pads, with @x,y where several pads share a name; then routed paths per layer and width w, separated by ;. In a path a pad name is that pad's centre, name@x,y a point inside that pad or via, vN(x,y) a via of type N, cw(c..) or ccw(c..) an arc to the next point about the centre after c; other vN are vias at no path point)
5V: P2.1 P4.3 P4.4 SB_LMD1.1 SB_LMD2.1
A3V3: C4.2 LMA1.3 P103.1 P200.1
AGND: C4.1 C5.1 C100.2 C101.2 C102.2 C112.2 C113.2 C114.2 C120.1 C121.2 C122.1 C125.2 C152.1 C153.1 C156.1 C157.1 C160.1 C161.1 C164.1 C165.1 C200.2 C201.2 C202.2 C211.2 C212.2 C214.2 C221.1 C222.2 C223.1 C225.2 C252.1 C253.1 CREFA100.1 CREFA200.1 CREFB100.1 CREFC100.1 CREFD100.1 HP1.2 HP2.2 HP3.2 HP4.2 HP5.2 LMA1.2 LMA1.4 P2.4 P7.3 P8.3 P101.3 P104.3 P106.3 P107.3 P201.3 R6.2 R156.1 R157.1 R164.1 R165.1 R172.1 R173.1 R180.1 R181.1 R256.1 R257.1 U100.3 U100.4 U101.6 U101.17 U101.24 U101.33 U101.35 U150.4 U151.4 U152.4 U153.4 U200.3 U200.4 U201.6 U201.17 U201.24 U201.33 U201.35 U251.4
AINAP1: C105.1 JHO150.2 P102.1
AINAP2: C205.1 JHO5.2 P203.1
AINBP1: C111.1 JHO151.2 P102.2
AINCP1: C119.1 JHO152.2 P102.3
AINDP1: C129.1 JHO153.2 P102.4
AOUT1: P102.5 U101.25
AOUT2: P203.2 U201.25
AVDD: C100.1 C101.1 C102.1 C113.1 C114.1 C200.1 C201.1 C202.1 C211.1 FB100.2 FB200.2 U100.1 U100.2 U101.5 U101.26 U150.8 U151.8 U152.8 U153.8 U200.2 U201.5 U201.26 U251.8
BOOT0: P4.21 U20.94
D3V3: C2.2 C26.1 C26.2 C27.1 C27.2 C28.1 C28.2 C29.1 C29.2 C30.1 C30.2 C31.1 C31.2 C32.1 C32.2 C33.1 C33.2 C34.1 C39.1 L20.1 LMD1.3 P100.1 P202.1 R22.2 T30.18 T30.19 U20.11 U20.19 U20.28 U20.50 U20.75 U20.100
DGND: C1.1 C2.1 C3.1 C6.1 C20.2 C21.2 C22.2 C23.1 C24.2 C25.2 C35.1 C36.1 C39.2 C41.2 C42.2 C106.2 C107.2 C108.2 C115.2 C116.2 C206.2 C207.2 C208.2 C215.2 C216.2 D1.2 D2.2 D3.2 D4.2 D5.2 LMD1.2 LMD1.4 P1.3 P3.1 P3.2 P3.5 P3.23 P3.49 P3.50 P4.1 P4.2 P4.49 P4.50 P7.4 P8.4 R6.1 T30.17 U20.10 U20.20 U20.27 U20.49 U20.74 U20.99 U101.7 U101.23 U201.7 U201.23
DVDD: C106.1 C107.1 C108.1 C206.1 C207.1 C208.1 FB101.2 FB201.2 P1.1 P3.3 P3.4 P4.5 P4.6 P4.22 U101.8 U101.22 U201.8 U201.22
EXT_AMP1_H1_IN: JHI150.1 P108.1
EXT_AMP1_H1_OUT: JHO150.3 P109.1
EXT_AMP2_H2_IN: JHI151.1 P108.2
EXT_AMP2_H2_OUT: JHO151.3 P109.2
EXT_AMP3_H3_IN: JHI152.1 P108.3
EXT_AMP3_H3_OUT: JHO152.3 P109.3
EXT_AMP4_H4_IN: JHI153.1 P108.4
EXT_AMP4_H4_OUT: JHO153.3 P109.4
EXT_AMP5_H5_IN: JHI5.1 P208.1
EXT_AMP5_H5_OUT: JHO5.3 P208.2
M1_EXT_AV: P7.1 P100.3
M1_EXT_DV: P7.2 P103.3
M2_EXT_AV: P8.1 P200.3
M2_EXT_DV: P8.2 P202.3
MAX1_OSCOUT: C1.2 U101.20
MAX2_OSCOUT: C6.2 U201.20
NetC3_2: C3.2 LMD1.1 SB_LMD1.2
NetC5_2: C5.2 LMA1.1 SB_LMD2.2
NetC20_1: C20.1 SB21.1 X20.2
NetC21_1: C21.1 R20.1 X20.1
NetC22_1: C22.1 C23.2 R21.2 U20.21
NetC24_1: C24.1 C25.1 L20.2 R21.1 U20.22
NetC34_2: C34.2 R22.1 U20.6
NetC35_2: C35.2 U20.73
NetC36_2: C36.2 U20.48
NetC37_1: C37.1 T30.21
NetC37_2: C37.2 T30.16
NetC38_1: C38.1 T30.22
NetC38_2: C38.2 T30.23
NetC40_1: C40.1 T30.1
NetC40_2: C40.2 T30.2
NetC41_1: C41.1 T30.20
NetC42_1: C42.1 T30.24
NetC103_1: C103.1 P101.2
NetC103_2: C103.2 C104.2 U101.3
NetC104_1: C104.1 C105.2 U101.4
NetC109_1: C109.1 P104.2
NetC109_2: C109.2 C110.2 U101.1
NetC110_1: C110.1 C111.2 U101.40
NetC112_1: C112.1 U100.6
NetC115_1: C115.1 C116.1 U101.9
NetC117_1: C117.1 P106.2
NetC117_2: C117.2 C118.2 U101.36
NetC118_1: C118.1 C119.2 U101.37
NetC120_2: C120.2 U101.27
NetC121_1: C121.1 U101.28
NetC122_2: C122.2 U101.29
NetC126_1: C126.1 P107.2
NetC126_2: C126.2 C127.2 U101.31
NetC127_1: C127.1 C129.2 U101.32
NetC150_1: C150.1 R152.2 R153.1
NetC150_2: C150.2 R150.2 R154.1 U150.1
NetC151_1: C151.1 R154.2 R155.1
NetC151_2: C151.2 JHO150.1 R151.2 U150.7
NetC152_2: C152.2 R153.2 U150.3
NetC153_2: C153.2 R155.2 U150.5
NetC154_1: C154.1 R160.2 R161.1
NetC154_2: C154.2 R158.2 R162.1 U151.1
NetC155_1: C155.1 R162.2 R163.1
NetC155_2: C155.2 JHO151.1 R159.2 U151.7
NetC156_2: C156.2 R161.2 U151.3
NetC157_2: C157.2 R163.2 U151.5
NetC158_1: C158.1 R168.2 R169.1
NetC158_2: C158.2 R166.2 R170.1 U152.1
NetC159_1: C159.1 R170.2 R171.1
NetC159_2: C159.2 JHO152.1 R167.2 U152.7
NetC160_2: C160.2 R169.2 U152.3
NetC161_2: C161.2 R171.2 U152.5
NetC162_1: C162.1 R176.2 R177.1
NetC162_2: C162.2 R174.2 R178.1 U153.1
NetC163_1: C163.1 R178.2 R179.1
NetC163_2: C163.2 JHO153.1 R175.2 U153.7
NetC164_2: C164.2 R177.2 U153.3
NetC165_2: C165.2 R179.2 U153.5
NetC203_1: C203.1 P201.2
NetC203_2: C203.2 C204.2 U201.3
NetC204_1: C204.1 C205.2 U201.4
NetC212_1: C212.1 U200.6
NetC214_1: C214.1 U200.1
NetC215_1: C215.1 C216.1 U201.9
NetC221_2: C221.2 U201.27
NetC222_1: C222.1 U201.28
NetC223_2: C223.2 U201.29
NetC250_1: C250.1 R252.2 R253.1
NetC250_2: C250.2 R250.2 R254.1 U251.1
NetC251_1: C251.1 R254.2 R255.1
NetC251_2: C251.2 JHO5.1 R251.2 U251.7
NetC252_2: C252.2 R253.2 U251.3
NetC253_2: C253.2 R255.2 U251.5
NetCREFA100_2: CREFA100.2 U101.2
NetCREFA200_2: CREFA200.2 U201.2
NetCREFB100_2: CREFB100.2 U101.39
NetCREFC100_2: CREFC100.2 U101.38
NetCREFD100_2: CREFD100.2 U101.30
NetD1_1: D1.1 R1.1
NetD2_1: D2.1 R2.1
NetD3_1: D3.1 R3.1
NetD4_1: D4.1 R4.1
NetD5_1: D5.1 R5.1
NetFB100_1: FB100.1 P100.2
NetFB101_1: FB101.1 P103.2
NetFB200_1: FB200.1 P200.2
NetFB201_1: FB201.1 P202.2
NetHP1_1: HP1.1 JHI150.2
NetHP2_1: HP2.1 JHI151.2
NetHP3_1: HP3.1 JHI152.2
NetHP4_1: HP4.1 JHI153.2
NetHP5_1: HP5.1 JHI5.2
NetJHI5_3: JHI5.3 R252.1
NetJHI150_3: JHI150.3 R152.1
NetJHI151_3: JHI151.3 R160.1
NetJHI152_3: JHI152.3 R168.1
NetJHI153_3: JHI153.3 R176.1
NetP105_1: P105.1 U100.7
NetP204_1: P204.1 U200.7
NetR20_2: R20.2 SB22.1 U20.13
NetR150_1: R150.1 R156.2 U150.2
NetR151_1: R151.1 R157.2 U150.6
NetR158_1: R158.1 R164.2 U151.2
NetR159_1: R159.1 R165.2 U151.6
NetR166_1: R166.1 R172.2 U152.2
NetR167_1: R167.1 R173.2 U152.6
NetR174_1: R174.1 R180.2 U153.2
NetR175_1: R175.1 R181.2 U153.6
NetR250_1: R250.1 R256.2 U251.2
NetR251_1: R251.1 R257.2 U251.6
NetSB20_1: SB20.1 SB21.2 U20.12
NRST: P1.5 P3.6 U20.14
PA0: P3.12 U20.23
PA1: P3.11 U20.24
PA2_USART2_TX: P3.14 T30.10 U20.25
PA3_USART2_RX: P3.13 T30.11 U20.26
PA4: P3.16 U20.29
PA5_SCLK: P3.15 U20.30 U101.16 U201.16
PA6_MISO: P3.18 U20.31 U101.14 U201.14
PA7_MOSI: P3.17 U20.32 U101.15 U201.15
PA8_MCO1: P4.43 U20.67 U101.19
PA9: P4.44 U20.68
PA10: P4.41 U20.69
PA11: P3.35 U20.70
PA12: P3.48 U20.71
PA13_SWDIO: P1.4 P4.42 U20.72
PA14_SWCLK: P1.2 P4.39 U20.76
PA15: P4.40 U20.77
PB0_SHDN1: P3.22 U20.35 U101.21
PB1_UP-DWN1: P3.21 U20.36 U101.10
PB2_DACSTEP1: P3.24 U20.37 U101.11
PB3_SWO: P1.6 P4.28 U20.89
PB4: P4.25 U20.90
PB5: P4.26 U20.91
PB6: P4.23 U20.92
PB7: P4.24 U20.93
PB8: P4.19 U20.95
PB9: P4.20 U20.96
PB10_CONVRUN1: P3.34 U20.47 U101.12
PB12_EOC2: P3.36 U20.51 U201.18
PB13_EOC1: P3.37 U20.52 U101.18
PB14: P3.38 U20.53
PB15: P3.39 U20.54
PC0_FORCEON: P3.8 T30.14 U20.15
PC1_FORCEOFF: P3.7 T30.15 U20.16
PC2_INVALID: P3.10 T30.13 U20.17
PC3: P3.9 U20.18
PC4: P3.20 U20.33
PC5: P3.19 U20.34
PC6: P4.47 U20.63
PC7: P4.48 U20.64
PC8: P4.45 U20.65
PC9_MCO2: P4.46 U20.66 U201.19
PC10: P4.37 U20.78
PC11: P4.38 U20.79
PC12: P4.35 U20.80
PC13: P4.12 U20.7
PC14: P4.9 U20.8
PC15: P4.10 U20.9
PD0_CS1: P4.36 U20.81 U101.13
PD1_CS2: P4.33 U20.82 U201.13
PD2: P4.34 U20.83
PD3: P4.31 U20.84
PD4: P4.32 U20.85
PD5: P4.29 U20.86
PD6: P4.30 U20.87
PD7: P4.27 U20.88
PD8: P3.40 U20.55
PD9: P3.41 U20.56
PD10_SHDN2: P3.42 U20.57 U201.21
PD11_UP-DWN2: P3.43 U20.58 U201.10
PD12_DACSTEP2: P3.44 U20.59 U201.11
PD13_LED1: P3.45 R1.2 U20.60
PD14_LED2: P3.46 R2.2 U20.61
PD15_LED3: P3.47 R3.2 U20.62
PE0_LED4: P4.17 R4.2 U20.97
PE1_LED5: P4.18 R5.2 U20.98
PE2: P4.15 U20.1
PE3: P4.16 U20.2
PE4: P4.13 U20.3
PE5: P4.14 U20.4
PE6: P4.11 U20.5
PE7: P3.25 U20.38
PE8: P3.26 U20.39
PE9: P3.27 U20.40
PE10: P3.28 U20.41
PE11: P3.29 U20.42
PE12: P3.30 U20.43
PE13: P3.31 U20.44
PE14: P3.32 U20.45
PE15_CONVRUN2: P3.33 U20.46 U201.12
PH0-OSC_IN: P4.7 SB20.2
PH1-OSC_OUT: P4.8 SB22.2
REFBP1: C125.1 P102.6 P105.2 U101.34
REFBP2: C225.1 P203.3 P204.2 U201.34
RS232_IN: P2.3 T30.4
RS232_OUT: P2.2 T30.5
pads on no net: P101.1 P104.1 P106.1 P107.1 P201.1 T30.3 T30.6 T30.7 T30.8 T30.9 T30.12 T30.25 U100.5 U100.8 U101.41 U200.5 U200.8 U201.1 U201.30 U201.31 U201.32 U201.36 U201.37 U201.38 U201.39 U201.40 U201.41
copper on no net:
  other v1: 1965.83,2101.85 2009.13,2101.85 2052.44,2101.85 2095.75,2101.85 1965.83,2145.16 2009.13,2145.16 2052.44,2145.16 2095.75,2145.16 1965.83,2188.46 2009.13,2188.46 2052.44,2188.46 2095.75,2188.46 1965.83,2231.77 2009.13,2231.77 2052.44,2231.77 2095.75,2231.77 438.35,2768.35 481.65,2768.35 438.35,2811.65 481.65,2811.65 2140.08,3240 2183.39,3240 2226.69,3240 2270,3240 2140.08,3283.31 2183.39,3283.31 2226.69,3283.31 2270,3283.31 2140.08,3326.61 2183.39,3326.61 2226.69,3326.61 2270,3326.61 2140.08,3369.92 2183.39,3369.92 2226.69,3369.92 2270,3369.92

## Polygon pours and split planes (outlines as drawn)
DGND on Top Layer "DGND" (none, shelved, pour order 4): 6020,4020 6020,1810 6020,1780 5280,1780 4540,1780 4190,1780 3840,1780 3140,1780 3070,1800 2980,1890 2980,4010 5990,4010 6000,4020
AGND on Top Layer "AGND" (none, shelved, pour order 0): 0,4020 -10,4010 -10,20 6020,20 6030,10 6020,20 6020,1770 3070,1770 2980,1860 2950,1890 2950,4030 0,4030

## Text inside footprints (layer, text, board x,y; h text height)
P3: Top Overlay "2" at 3330,2250 h39.37; Top Overlay "1" at 3330,2150 h39.37; Top Overlay "49" at 5910,2150 h39.37; Top Overlay "50" at 5910,2250 h39.37
P4: Top Overlay "2" at 3340,3910 h39.37; Top Overlay "1" at 3340,3810 h39.37; Top Overlay "49" at 5920,3810 h39.37; Top Overlay "50" at 5920,3910 h39.37